# Altium PCB PCB1.PcbDoc
Units mil, origin at the board's own origin, x right, y up, seen from the top; angles counter-clockwise.
Board outline 6000 x 4000 mil, 2 copper layers (Top Layer, Bottom Layer); 53 components, 65 nets, 238 pads, 0 vias.
Unrouted connection lines stored in the file: 158.
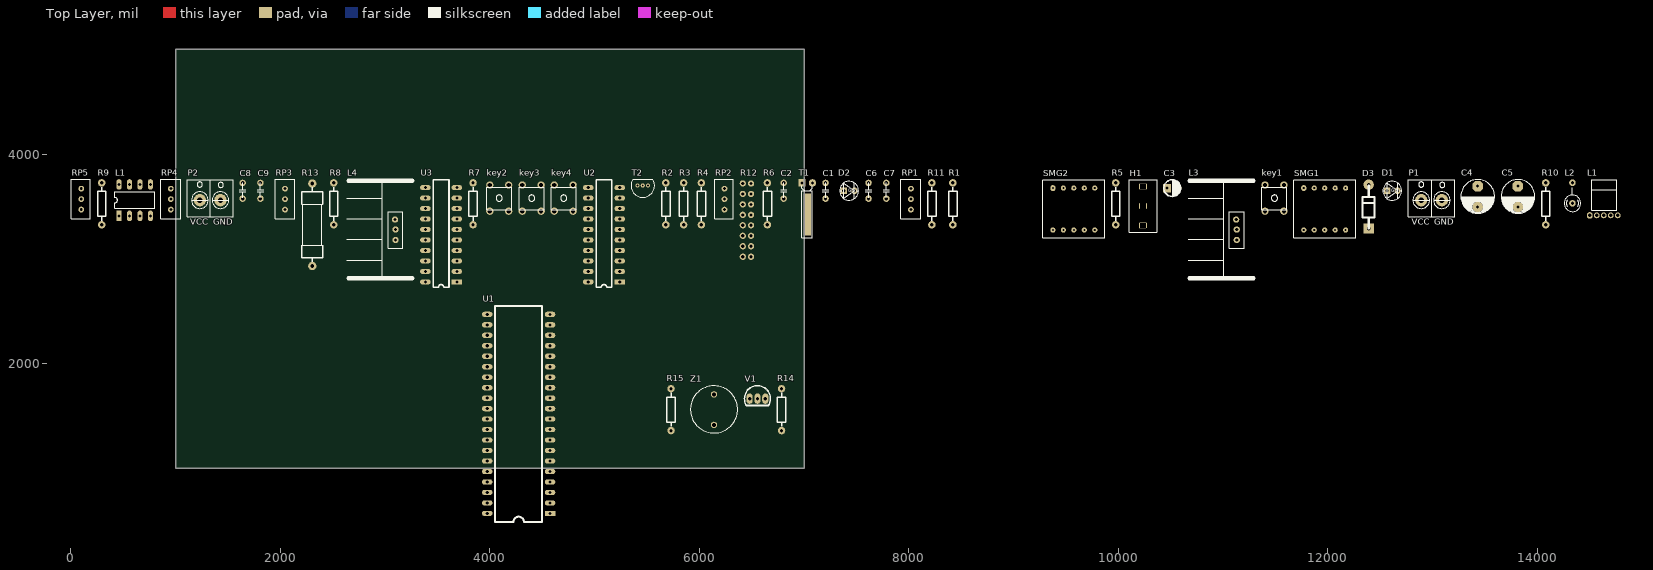
[diagram p0: Top Layer view]
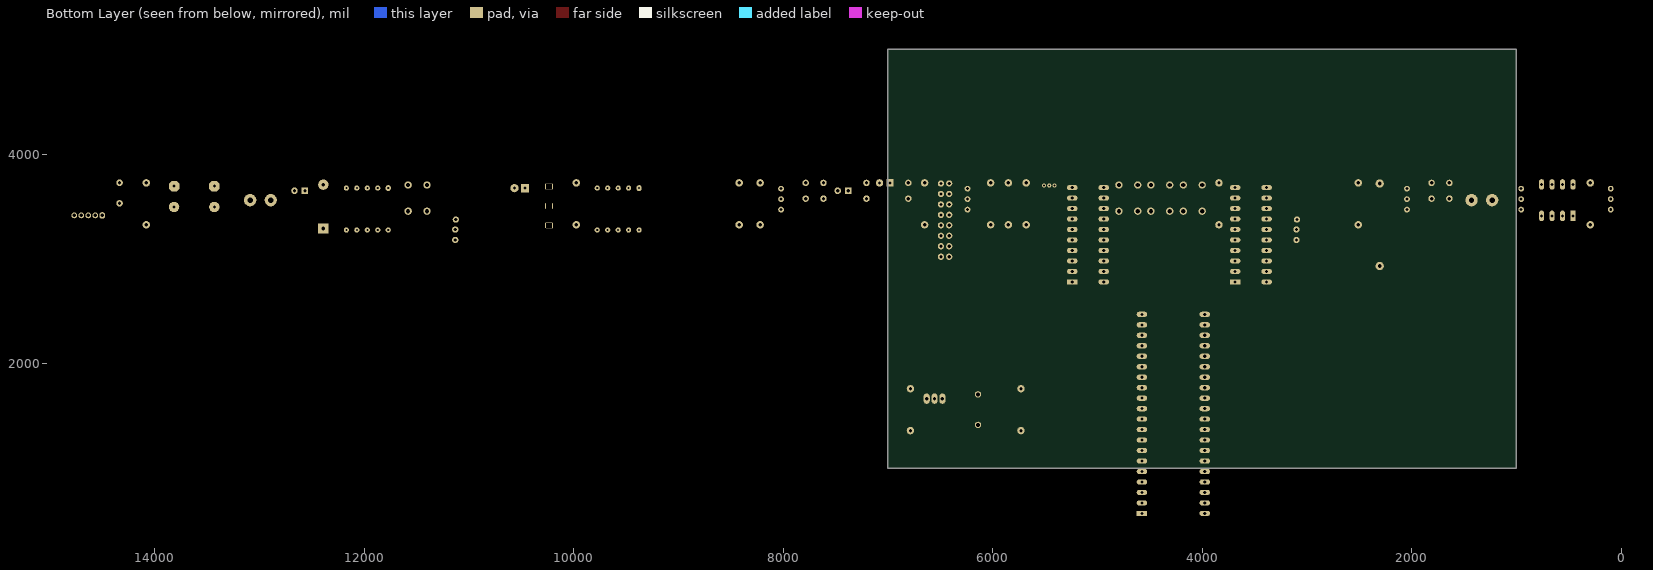
[diagram p1: Bottom Layer view, seen from below]

## Layer stack, top to bottom
Top Solder: solder mask 0.4, Solder Resist, Dk 3.5
Top Layer: signal copper 1.4
Dielectric 1: dielectric 12.6, FR-4, Dk 4.8
Bottom Layer: signal copper 1.4
Bottom Solder: solder mask 0.4, Solder Resist, Dk 3.5

## Board outline
1000,1000 7000,1000 7000,5000 1000,5000

## Design rules (kind name [scope] priority, off if disabled: settings)
Clearance [All] p1: gap=10 ignorepadtopadclearanceinfootprint=FALSE except(0: Arc-Hole Track-Hole SMDPad-Hole THPad-Hole Via-Hole Fill-Hole Poly-Hole Region-Hole Text-Hole)
PolygonConnect [All] p1: connectstyle=Relief reliefconductorwidth=10 reliefentries=4 polygonreliefangle="90 Angle" airgapwidth=10
RoutingVias [All] p1: holewidth=28 width=50 viastyle="Through Hole" minholewidth=28 minwidth=50 maxholewidth=28 maxwidth=50
SolderMaskExpansion [All] p1: expansion=4 istentingtop=FALSE
Width [All] p1: maxlimit=10 minlimit=10 preferedwidth=10
30 further rules are at their usual default settings.

## Components (designator, comment, footprint, x,y, rotation, side; value= is the part's Value field where it differs from the comment)
C1 "22P" 电容_瓷片 7205,3650 r90 top
C2 "22P" 电容_瓷片 6805,3650 r90 top
C3 "10uf" 电解电容_小 10515,3670 r0 top
C4 "470μF" 电解电容_大 13430,3595 r0 top
C5 "220uF" 电解电容_大 13815,3595 r0 top
C6 "0.1μF" 电容_瓷片 7615,3650 r90 top
C7 "1μF" 电容_瓷片 7785,3650 r90 top
C8 "0.1μF" 电容_瓷片 1640,3650 r90 top
C9 "1μF" 电容_瓷片 1810,3650 r90 top
D1 "LED" LED_G 12615,3650 r0 top
D2 "LED" LED_G 7430,3650 r0 top
D3 "IN5824" 二极管_整流 12390,3530 r90 top
H1 "滑动开关" 滑动开关 10245,3500 r90 top
key1 "KEY_1" AN66 11490,3580 r0 top
key2 "KEY_1" AN66 4090,3580 r0 top
key3 "KEY_1" AN66 4400,3580 r0 top
key4 "KEY_1" AN66 4705,3580 r0 top
L1 "LM258" DIP8 460,3410 r0 top
L1 "LM2596" LM2596 14535,3975 r0 top
L2 "47μH" AL0410_V 14335,3530 r90 top
L3 "LM317_Adj" 7805散热器 11130,3180 r90 top
L4 "LM317_Adj" 7805散热器 3100,3180 r90 top
P1 "电源端子2P" 电源端子2P 12990,3560 r0 top
P2 "电源端子2P" 电源端子2P 1330,3560 r0 top
R1 "10k" 1/4WA1 8420,3325 r90 top value=10K
R2 "10k" 1/4WA1 5680,3325 r90 top value=10K
R3 "10k" 1/4WA1 5850,3325 r90 top value=10K
R4 "10k" 1/4WA1 6020,3325 r90 top value=10K
R5 "200" 1/4WA1 9975,3325 r90 top value=10K
R6 "1k" 1/4WA1 6650,3325 r90 top value=10K
R7 "100" 1/4WA1 3840,3325 r90 top value=10K
R8 "200" 1/4WA1 2510,3325 r90 top value=10K
R9 "1k" 1/4WA1 295,3325 r90 top value=10K
R10 "1k" 1/4WA1 14080,3325 r90 top value=10K
R11 "100" 1/4WA1 8220,3325 r90 top value=10K
R12 "100" "RES_PACK - 2" 6415,3020 r90 top value=10K
R13 "10" AXIAL-20*5MM-W 2305,3325 r90 top value=10K
R14 "100" 1/4WA1 6785,1360 r90 top value=10K
R15 "100" 1/4WA1 5730,1360 r90 top value=10K
RP1 "1K" 3296-103 8020,3470 r90 top value=10K
RP2 "200" 3296-200 6240,3470 r90 top value=10K
RP3 "1K" 3296-103 2045,3470 r90 top value=10K
RP4 "20k" 3296-203 955,3470 r90 top value=10K
RP5 "10k" 3296-100 100,3470 r90 top value=10K
SMG1 "共阴数码管" 0.36英寸2位数码管 11970,3470 r0 top
SMG2 "共阴数码管" 0.36英寸2位数码管 9575,3470 r0 top
T1 "11.0592KHZ" 晶振_小 7030,3575 r0 top
T2 "TL431" TL431 5460,3620 r0 top
U1 "STC89C52" DIP40 4275,1520 r90 top
U2 "74HC245" DIP20 5240,2780 r90 top
U3 "DAC0832" DIP20 3685,2780 r90 top
V1 "9012" 三极管PNP 6555,1665 r0 top
Z1 "BUZZER" BUZZER 6140,1415 r0 top

## Footprints (in the part's own frame and the unit in brackets; to place one, negate y for a bottom-side part, rotate by r counter-clockwise, add the part's x,y. Pads: shape width x height; smd on the part's side, far side on the other; paste and mask are expansions set on the pad)
0.36英寸2位数码管 [mm]
  round 1.25 hole 0.5: a(0,-4.953) b(-2.54,5.207) c(0,5.207) d(5.08,5.207) dp(-2.54,-4.953) e(2.54,5.207) f(2.54,-4.953) g(-5.08,-4.953) H2(5.08,-4.953)
  oval 1.25x1.45 hole 0.5: H1(-5.08,5.207)
  silkscreen extent -7.51,-6.86 7.51,7.24
1/4WA1 [mm]
  round 1.8 hole 0.813: 1(0,0) 2(10.16,0)
  silkscreen extent 1.02,-1.02 9.14,1.02, body extent -0.27,-1.28 10.49,1.24, height 2
3296-100 [mm]
  round 1.4 hole 0.7: 1(0,0) 2(5.08,0) 3(2.54,0)
  silkscreen extent -2.16,-2.16 7.37,2.41, body extent -2.22,-2.41 7.3,2.41, height 11.73
3296-103 [mm]
  round 1.4 hole 0.7: 1(0,0) 2(5.08,0) 3(2.54,0)
  silkscreen extent -2.16,-2.41 7.37,2.41, body extent -2.22,-2.41 7.3,2.41, height 11.73
3296-200 [mm]
  round 1.4 hole 0.7: 1(0,0) 2(5.08,0) 3(2.54,0)
  silkscreen extent -2.16,-2.16 7.37,2.41, body extent -2.17,-2.29 7.36,2.54, height 11.73
3296-203 [mm]
  round 1.4 hole 0.7: 1(0,0) 2(5.08,0) 3(2.54,0)
  silkscreen extent -2.16,-2.39 7.37,2.41, body extent -2.22,-2.42 7.3,2.41, height 11.63
7805散热器 [mil]
  round 60 hole 30: 1(0,0) 2(100,0) 3(195,5)
  silkscreen extent -365,-160 565,465, body extent -366,-160 556,450, height 976
AL0410_V [mm] "5*4*10.5mm（脚距，直径，长度）"
  round 1.6 hole 0.8: 1(0,0) 2(5,0)
  silkscreen extent -2,-2 3.81,2, body extent -2.01,-2.01 5.32,2.01, height 12.39
AN66 [mil]
  round 70 hole 40: 1(-90,125) 1(90,125) 2(-90,-125) 2(90,-125)
  silkscreen extent -120,-110 120,105
AXIAL-20*5MM-W [mm] "2W电阻"
  round 2 hole 0.9: 1(-10,0) 2(10,0)
  silkscreen extent -8.98,-2.6 9.07,2.6, body extent -10.43,-2.51 10.37,2.49, height 5.8
BUZZER [mil]
  round 60 hole 39: +(0,0) -(0,291.34)
  silkscreen extent -225,-77 225,373, body extent -236,-91 236,381, height 299
DIP8 [mil]
  rect 50x100 hole 30: 1(0,0)
  oval 50x100 hole 30: 2(100,0) 3(200,0) 4(300,0) 5(300,300) 6(200,300) 7(100,300) 8(0,300)
  silkscreen extent -39,71 339,229, body extent -39,-5 339,305, height 173
DIP20 [mil]
  rect 50x100 hole 30: 1(0,0)
  oval 50x100 hole 30: 2(100,0) 3(200,0) 4(300,0) 5(400,0) 6(500,0) 7(600,0) 8(700,0) 9(800,0) 10(900,0) 11(900,300) 12(800,300) 13(700,300) 14(600,300) 15(500,300) 16(400,300) 17(300,300) 18(200,300) 19(100,300) 20(0,300)
  silkscreen extent -50,75 975,225, body extent -70,-5 970,305, height 169
DIP40 [mil]
  rect 50x100 hole 30: 1(-950,-300)
  oval 50x100 hole 30: 2(-850,-300) 3(-750,-300) 4(-650,-300) 5(-550,-300) 6(-450,-300) 7(-350,-300) 8(-250,-300) 9(-150,-300) 10(-50,-300) 11(50,-300) 12(150,-300) 13(250,-300) 14(350,-300) 15(450,-300) 16(550,-300) 17(650,-300) 18(750,-300) 19(850,-300) 20(950,-300) 21(950,300) 22(850,300) 23(750,300) 24(650,300) 25(550,300) 26(450,300) 27(350,300) 28(250,300) 29(150,300) 30(50,300) 31(-50,300) 32(-150,300) 33(-250,300) 34(-350,300) 35(-450,300) 36(-550,300) 37(-650,300) 38(-750,300) 39(-850,300) 40(-950,300)
  silkscreen extent -1031,-225 1031,225, body extent -1031,-306 1032,306, height 197
LED_G [mil] "绿色发光二极管"
  rect 62x62 hole 32: 1(-50,0)
  round 62 hole 32: 2(50,0)
  silkscreen extent -90,-90 90,90, body extent -112,-112 98,112, height 339
LM2596 [mm]
  oval 1.4x1.6 hole 0.89: 1(-0.889,-14.224)
  round 1.4 hole 0.89: 2(0.811,-14.224) 3(2.511,-14.224) 4(4.211,-14.224) 5(5.911,-14.224)
  silkscreen extent -0.38,-12.95 5.62,-5.54
"RES_PACK - 2" [mil]
  round 60 hole 30: 1(0,0) 2(100,0) 3(200,0) 4(300,0) 5(400,0) 6(500,0) 7(600,0) 8(700,0) 9(0,-78.74) 10(100,-78.74) 11(200,-78.74) 12(300,-78.74) 13(400,-78.74) 14(500,-78.74) 15(600,-78.74) 16(698.43,-78.74)
  body extent -42,-103 742,24, height 10
TL431 [mm] "TL431"
  round 1 hole 0.46: 1(1.27,2.032) 2(0,2.032) 3(-1.27,2.032)
  silkscreen extent -2.85,-0.82 2.85,3.56
三极管PNP [mm] "三极管PNP"
  oval 1.5x2.5 hole 0.8: B(0,0) C(1.905,0) E(-1.905,0)
  silkscreen extent -3.15,-1.7 3.15,3.15
二极管_整流 [mm] "整流二极管"
  rect 2.5x2.5 hole 0.9: 1(-6.123,0)
  round 2.5 hole 0.9: 2(4.514,0)
  silkscreen extent -6.12,-1.4 4.35,1.52, body extent -6.42,-1.3 4.64,1.3, height 3.3
晶振_小 [mm] "晶振"
  rect 1.8x1.8 hole 0.7: 1(-1.27,3.81)
  round 1.8 hole 0.7: 2(1.27,3.81)
  rect 1.778x10.16 smd: 3(0,-3.81)
  silkscreen extent -1.27,-9.53 1.27,3.17
滑动开关 [mm] "SS12D10"
  rrect50% 1.5x2 hole 1.3 square: 1(0.127,0.254) 2(-4.573,0.254) 3(4.827,0.254)
  silkscreen extent -6.22,-3.17 6.48,3.55
电容_瓷片 [mil] "电容"
  round 62 hole 32: 1(-75,0) 2(75,0)
  silkscreen extent -65,-30 75,30
电源端子2P [mm] "电源端子2P"
  round 3 hole 1.3: 1(-2.5,0) 2(2.5,0)
  silkscreen extent -5.6,-4 5.6,5
电解电容_大 [mm] "电解电容"
  oct 2.54x2.54 hole 0.7: 1(0,2.54)
  round 2.54 hole 0.7: 2(0,-2.54)
  silkscreen extent -4.08,-4.09 4.11,4.11
电解电容_小 [mm] "电解电容"
  rect 2x2 hole 0.7: 1(-1.27,0.127)
  round 2 hole 0.7: 2(1.27,0.127)
  silkscreen extent -2.03,-1.91 2.03,2.16

## Part data
C1 C2 C6 C7 C8 C9: library part 电容_瓷片, "瓷片电容"
C3: library part 电解电容_小, "电解电容"
C4 C5: library part 电解电容_大, "电解电容"
D1 D2: "发光二极管", Package Description=DIODE0.4及DIODE0.7, Component Link1Description=元件数据连接1，一般是生产厂商的元件描述连接。, Component Link 1URL=元件厂商的网站连接1，通常是主页地址，如http://www.st.com/, Component Link 2URL=元件厂商的网站连接2，通常是元件数据说明文件地址，如http://www.fairchildsemi.com/ds/2N%2F2N3904.pdf, ComponentLink2  Description=元件数据连接2，一般是生产厂商的元件数据库连接。, Created=制造厂商, Datasheet Version=Apr-2016, Kind=General, Latest Revision Date=13-Apr-2016, Latest Revision Note=最近的应用笔记修订本, Object=Diode, Published=13-Apr-2016, Publisher="Altium Limited", Spice Prefix=D, SubKind=Diode, Type=Diode
D3: library part 二极管_整流, "整流二极管"
L2: library part Inductor4, Package Description=封装描述, Component Link1Description=元件数据连接1，一般是生产厂商的元件描述连接。, Component Link 1URL=元件厂商的网站连接1，通常是主页地址，如http://www.st.com/, Component Link 2URL=元件厂商的网站连接2，通常是元件数据说明文件地址，如http://www.fairchildsemi.com/ds/2N%2F2N3904.pdf, ComponentLink2  Description=元件数据连接2，一般是生产厂商的元件数据库连接。, Created=制造厂商, Datasheet Version=Apr-2016, Kind=General, Latest Revision Date=13-Apr-2016, Latest Revision Note=最近的应用笔记修订本, LatestRevisionDate=13-Apr-2016, LatestRevisionNote="Re-released for DXP Platform.", Object=Inductor, PackageReference=425, Published=13-Apr-2016, Publisher="Altium Limited", Spice Prefix=L, SubKind=Inductor
L3 L4: library part LM317, "可调直流稳压芯片"
P1 P2: "电源端子", =电源端子2P
R1 R2 R3 R4 R5 R6 R7 R8 R9 R10 R11 R14 R15: library part Res_3, "1/4W电阻器", Package Description=AXIAL0.3-AXIA1.0, Package Reference=AXIAL, Component Link1Description=元件数据连接1，一般是生产厂商的元件描述连接。, Component Link 1URL=元件厂商的网站连接1，通常是主页地址，如http://www.st.com/, Component Link 2URL=元件厂商的网站连接2，通常是元件数据说明文件地址，如http://www.fairchildsemi.com/ds/2N%2F2N3904.pdf, ComponentLink2  Description=元件数据连接2，一般是生产厂商的元件数据库连接。, Created=制造厂商, Datasheet Version=Apr-2016, Kind=General, Latest Revision Date=13-Apr-2016, Latest Revision Note=最近的应用笔记修订本, LatestRevisionDate=13-Apr-2016, Object=Resistor, PackageVersion=Apr-2016, Published=13-Apr-2016, Publisher="Altium Limited", Spice Prefix=R, SubKind=Resistor, Type=Resistor
R12: library part Res_Pack8, "排阻", Package Description=AXIAL0.3-AXIA1.0, Package Reference=AXIAL, Component Link1Description=元件数据连接1，一般是生产厂商的元件描述连接。, Component Link 1URL=元件厂商的网站连接1，通常是主页地址，如http://www.st.com/, Component Link 2URL=元件厂商的网站连接2，通常是元件数据说明文件地址，如http://www.fairchildsemi.com/ds/2N%2F2N3904.pdf, ComponentLink2  Description=元件数据连接2，一般是生产厂商的元件数据库连接。, Created=制造厂商, Datasheet Version=Apr-2016, Kind=General, Latest Revision Date=13-Apr-2016, Latest Revision Note=最近的应用笔记修订本, LatestRevisionDate=13-Apr-2016, Object=Resistor, PackageVersion=Apr-2016, Published=13-Apr-2016, Publisher="Altium Limited", Spice Prefix=R, SubKind=Resistor, Type=Resistor
R13: library part Res_7, "5W电阻器", Package Description=AXIAL0.3-AXIA1.0, Package Reference=AXIAL, Component Link1Description=元件数据连接1，一般是生产厂商的元件描述连接。, Component Link 1URL=元件厂商的网站连接1，通常是主页地址，如http://www.st.com/, Component Link 2URL=元件厂商的网站连接2，通常是元件数据说明文件地址，如http://www.fairchildsemi.com/ds/2N%2F2N3904.pdf, ComponentLink2  Description=元件数据连接2，一般是生产厂商的元件数据库连接。, Created=制造厂商, Datasheet Version=Apr-2016, Kind=General, Latest Revision Date=13-Apr-2016, Latest Revision Note=最近的应用笔记修订本, LatestRevisionDate=13-Apr-2016, Object=Resistor, PackageVersion=Apr-2016, Published=13-Apr-2016, Publisher="Altium Limited", Spice Prefix=R, SubKind=Resistor, Type=Resistor
RP1 RP2 RP3 RP4 RP5: library part RESVR, "滑动触点电位器", Package Description=AXIAL0.3-AXIA1.0, Package Reference=AXIAL, Component Link1Description=元件数据连接1，一般是生产厂商的元件描述连接。, Component Link 1URL=元件厂商的网站连接1，通常是主页地址，如http://www.st.com/, Component Link 2URL=元件厂商的网站连接2，通常是元件数据说明文件地址，如http://www.fairchildsemi.com/ds/2N%2F2N3904.pdf, ComponentLink2  Description=元件数据连接2，一般是生产厂商的元件数据库连接。, Created=制造厂商, Datasheet Version=Apr-2016, Kind=General, Latest Revision Date=13-Apr-2016, Latest Revision Note=最近的应用笔记修订本, LatestRevisionDate=13-Apr-2016, Object=Resistor, PackageVersion=Apr-2016, Published=13-Apr-2016, Publisher="Altium Limited", Spice Prefix=R, SubKind=Resistor, Type=Resistor
SMG1 SMG2: library part 二位数码管
T1: library part 晶振_小, "晶振"
U1: "51系列单片机", Package Description=DIP-40, Component Link1Description=元件数据连接1，一般是生产厂商的元件描述连接。, Component Link 1URL=元件厂商的网站连接1，通常是主页地址，如http://www.st.com/, Component Link 2URL=元件厂商的网站连接2，通常是元件数据说明文件地址，如http://www.fairchildsemi.com/ds/2N%2F2N3904.pdf, ComponentLink2  Description=元件数据连接2，一般是生产厂商的元件数据库连接。, Created=制造厂商, Datasheet Version=Jun-2016, Kind=General, Latest Revision Date=5-Jun-2016, Latest Revision Note=最近的应用笔记修订本, Published=5-Jun-2016, Publisher="Altium Limited", Spice Prefix=U, SubKind=Chip
U2: "总线驱动器"
U3: "数模转换器件", Package Description=封装描述, Component Link1Description=元件数据连接1，一般是生产厂商的元件描述连接。, Component Link 1URL=元件厂商的网站连接1，通常是主页地址，如http://www.st.com/, Component Link 2URL=元件厂商的网站连接2，通常是元件数据说明文件地址，如http://www.fairchildsemi.com/ds/2N%2F2N3904.pdf, ComponentLink2  Description=元件数据连接2，一般是生产厂商的元件数据库连接。, Created=制造厂商, Datasheet Version=Apr-2016, Kind=General, Latest Revision Date=14-Apr-2016, Latest Revision Note=最近的应用笔记修订本, LatestRevisionDate=5-Sep-2016, Published=14-Apr-2016, Publisher="Altium Limited", Spice Prefix=U, SubKind=Chip, 价格=0.0
V1: library part 9012三极管, "PNP三极管"
Z1: "蜂鸣器"

## Nets (pads, with @x,y where several pads share a name; then routed paths per layer and width w, separated by ;. In a path a pad name is that pad's centre, name@x,y a point inside that pad or via, vN(x,y) a via of type N, cw(c..) or ccw(c..) an arc to the next point about the centre after c; other vN are vias at no path point)
+5.12v: R6.2 RP2.1 RP2.3 T2.3 U3.8
+5v: C3.1 C7.2 key1.2 L3.2 R2.1 R3.1 R4.1 R5.1 R11.1 U1.31 U1.40 V1.E
+12v: C5.1 C6.2 L1.4@14700.79,3415 L2.2 L3.3 R6.1 R10.1 U3.19 U3.20
+24v: C4.1 H1.3 L1.1@14500,3415 L1.8
a: R12.16 SMG1.a SMG2.a
b: R12.14 SMG1.b SMG2.b
B0: U1.39 U2.18
B1: U1.38 U2.17
B2: U1.37 U2.16
B3: U1.36 U2.15
B4: U1.35 U2.14
B5: U1.34 U2.13
B6: U1.33 U2.12
B7: U1.32 U2.11
c: R12.12 SMG1.c SMG2.c
d: R12.10 SMG1.d SMG2.d
D0: U1.21 U3.7
D1: U1.22 U3.6
D2: U1.23 U3.5
D3: U1.24 U3.4
D4: U1.25 U3.16
D5: U1.26 U3.15
D6: U1.27 U3.14
D7: U1.28 U3.13
DEEP: R14.1 U1.5
dp: R12.2 SMG1.dp SMG2.dp
e: R12.8 SMG1.e SMG2.e
f: R12.6 SMG1.f SMG2.f
g: R12.4 SMG1.g SMG2.g
GND: C1.1 C2.1 C6.1 C7.1 C8.1 C9.1 D2.2 key2.1 key3.1 key4.1 L1.3@660,3410 L1.4@760,3410 L1.5@760,3710 P1.2 P2.2 R1.2 R7.2 R13.2 R15.1 RP1.2 RP3.2 T2.2 U1.20 U2.1 U2.10 U2.20 U3.1 U3.2 U3.3 U3.10 U3.12 U3.17 U3.18
K1: key2.2 R2.2 U1.6
K2: key3.2 R3.2 U1.7
K3: key4.2 R4.2 U1.8
NetC4_2: C4.2 C5.2 D1.2 D3.1 L1.3@14633.86,3415 L1.5@14767.72,3415
NetC9_2: C9.2 L4.2 P2.1 R8.1 R13.1
NetD1_1: D1.1 R10.2
NetD2_1: D2.1 R11.2
NetD3_2: D3.2 L1.2@14566.93,3415 L2.1
NetH1_1: H1.1 P1.1
NetL1_2: L1.2@560,3410 RP4.2 RP4.3
NetL1_6: L1.6 R9.2 RP5.1 RP5.3
NetL3_1: L3.1 R5.2 RP1.1 RP1.3
NetL4_1: L4.1 R8.2 RP3.1 RP3.3
NetR7_1: R7.1 RP2.2 T2.1
NetR12_1: R12.1 U2.9
NetR12_3: R12.3 U2.8
NetR12_5: R12.5 U2.7
NetR12_7: R12.7 U2.6
NetR12_9: R12.9 U2.5
NetR12_11: R12.11 U2.4
NetR12_13: R12.13 U2.3
NetR12_15: R12.15 U2.2
NetR14_2: R14.2 V1.B
NetR15_2: R15.2
NetRP4_1: RP4.1 U3.11
NetV1_C: V1.C
O1: C8.2 L1.7 L4.3 RP5.2
RET: C3.2 key1.1 R1.1 U1.9
RFB: L1.1@460,3410 R9.1 U3.9
W1: SMG2.H1 U1.1
W2: SMG2.H2 U1.2
W3: SMG1.H1 U1.3
W4: SMG1.H2 U1.4
XTAL1: C2.2 T1.2 U1.19
XTAL2: C1.2 T1.1 U1.18
pads on no net: H1.2 T1.3 U1.10 U1.11 U1.12 U1.13 U1.14 U1.15 U1.16 U1.17 U1.29 U1.30 U2.19 Z1.+ Z1.-

## Text inside footprints (layer, text, board x,y; h text height)
D1: Top Overlay "G" at 12605,3635 h30
D2: Top Overlay "G" at 7420,3635 h30
P1: Top Overlay "VCC" at 12801.57,3325 h60; Top Overlay "GND" at 13017.57,3325 h60
P2: Top Overlay "VCC" at 1141.57,3325 h60; Top Overlay "GND" at 1357.57,3325 h60